# Altium PCB BIOWOLF_FLEX.PcbDoc
Units mm, origin at the board's own origin, x right, y up, seen from the top; angles counter-clockwise.
Board outline 152.4 x 101.6 mm, 4 copper layers (Top Layer, Mid-Layer 1, Mid-Layer 2, Bottom Layer); 78 components, 173 nets, 454 pads, 64 vias.
Unrouted connection lines stored in the file: 142.
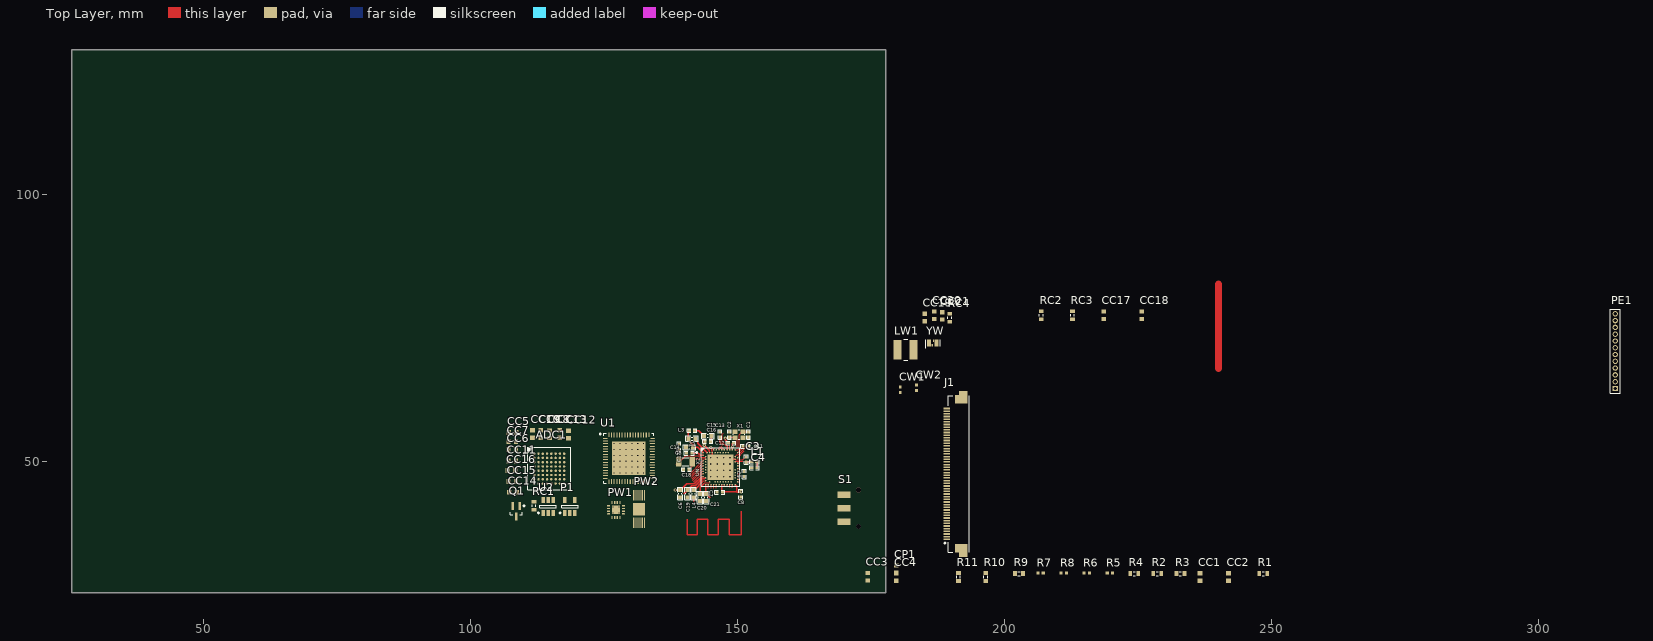
[diagram p0: Top Layer view]
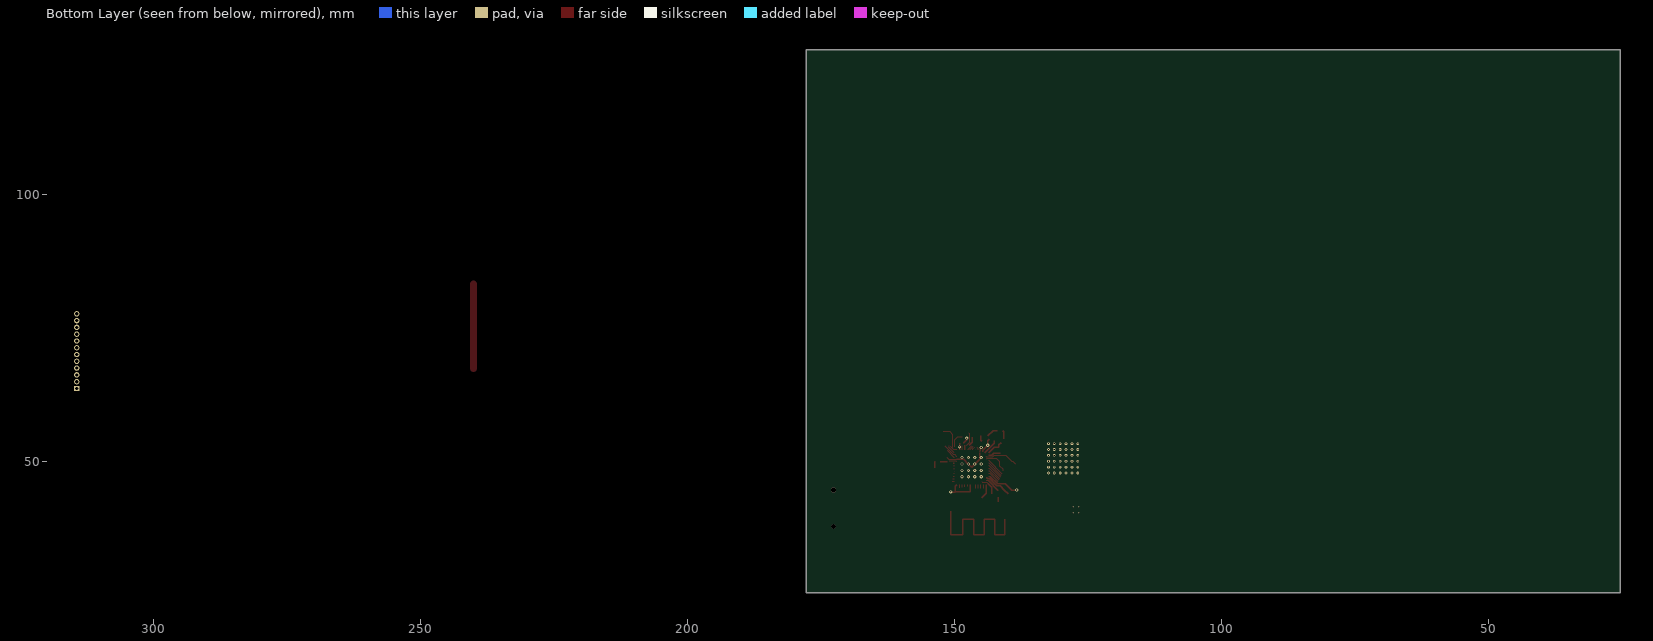
[diagram p1: Bottom Layer view, seen from below]
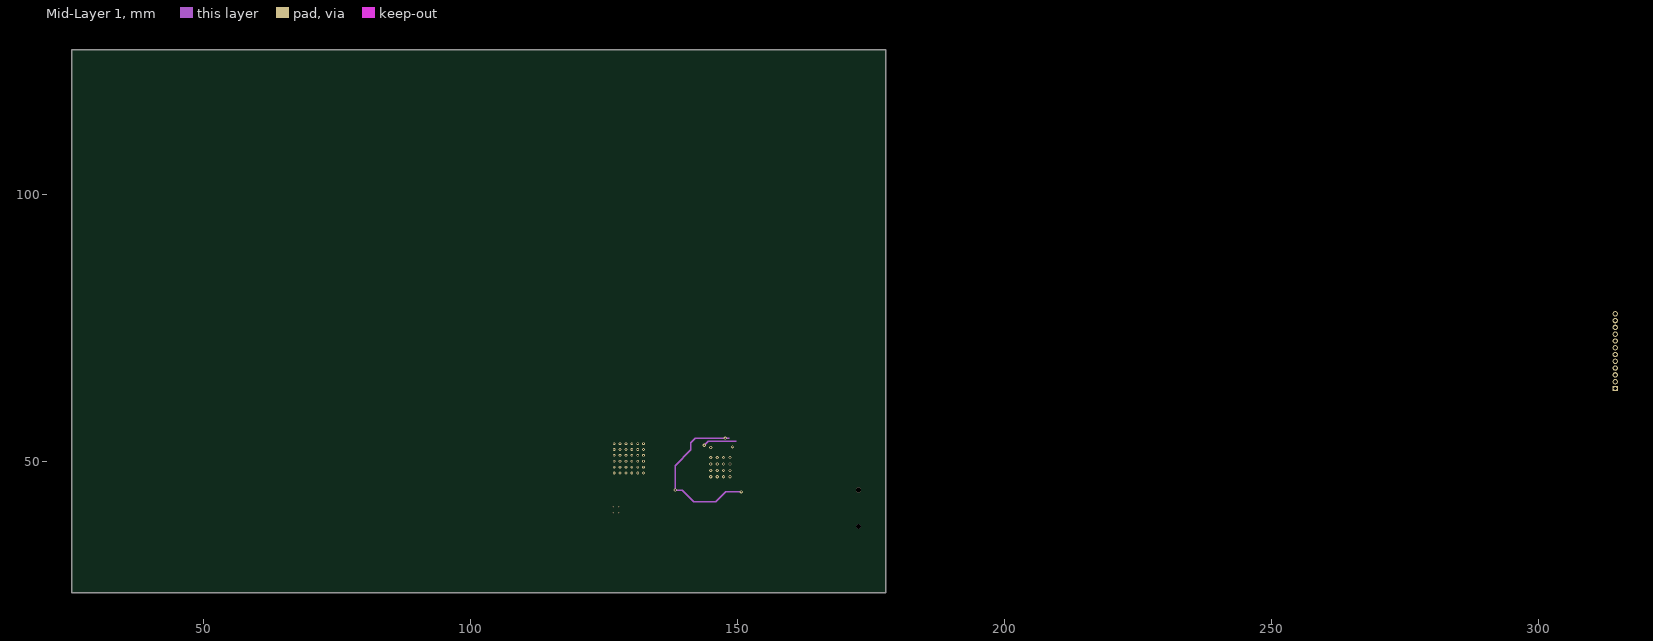
[diagram p2: Mid-Layer 1]

## Layer stack, top to bottom
Top Solder: solder mask 0.0102, Solder Resist, Dk 3.5
Top Layer: signal copper 0.0356
Dielectric 1: dielectric 0.32, FR-4, Dk 4.8
Mid-Layer 1: signal copper 0.0356
Dielectric2: dielectric 0.32, FR-4, Dk 4.8
Mid-Layer 2: signal copper 0.0356
Dielectric3: dielectric 0.32, FR-4, Dk 4.8
Bottom Layer: signal copper 0.0356
Bottom Solder: solder mask 0.0102, Solder Resist, Dk 3.5

## Board outline
25.4,25.4 177.8,25.4 177.8,127 25.4,127

## Design rules (kind name [scope] priority, off if disabled: settings)
Clearance [All] p1: gap=0.254
PolygonConnect [All] p1: connectstyle=Relief reliefconductorwidth=0.254 reliefentries=4 polygonreliefangle="90 Angle" airgapwidth=0.254
RoomDefinition ADC [InComponentClass('ADC')] p1: confinementstyle=ConfineIn formatcopy=TRUE lockcomponents=FALSE outline 178.943,62.484 350.774,62.484 350.774,81.28 178.943,81.28
RoomDefinition BATTERY [InComponentClass('BATTERY')] p2: confinementstyle=ConfineIn formatcopy=TRUE lockcomponents=FALSE outline 178.943,26.924 249.936,26.924 249.936,32.258 178.943,32.258
RoomDefinition NRF [InComponentClass('NRF')] p3: confinementstyle=ConfineIn formatcopy=TRUE lockcomponents=FALSE outline 178.943,76.962 187.706,76.962 187.706,87.376 178.943,87.376
RoomDefinition MRWOLF [InComponentClass('MRWOLF')] p4: confinementstyle=ConfineIn formatcopy=TRUE lockcomponents=FALSE outline 178.943,62.484 200.406,62.484 200.406,75.692 178.943,75.692
RoomDefinition CNCTS [InComponentClass('CNCTS')] p5: confinementstyle=ConfineIn formatcopy=TRUE lockcomponents=FALSE outline 226.194,52.071 234.068,52.071 234.068,86.361 226.194,86.361
RoutingVias [All] p1: holewidth=0.711 width=1.27 viastyle="Through Hole" minholewidth=0.711 minwidth=1.27 maxholewidth=0.711 maxwidth=1.27
SolderMaskExpansion [All] p1: expansion=0.102
Width [All] p1: maxlimit=0.254 minlimit=0.254 preferedwidth=0.254
30 further rules are at their usual default settings.

## Classes and differential pairs
component class NRF: C1 C2 C3 C4 C5 C6 C7 C8 C9 C11 C12 C13 C14 C15 C16 C17 C18 C19 C20 C21 CN1 CN2 CN3 CN4 CN5 CN6 CN7 CN8 CN9 CN10 CN11 CN12 CN13 CN14 CN15 CN16 CN17 CN18 CN19 CN20 CN21 CN22 L1 L2 L3 L4 LN1 LN2 LN3 LN4 UN X1 X2 XN1 XN2
component class MRWOLF: CW1 CW2 LW1 U1 YW
component class CNCTS: J1
component class BATTERY: CC1 CC2 CC3 CC4 CP1 P1 PW1 PW2 R1 R2 R3 R4 R5 R6 R7 R8 R9 R10 R11 S1
component class ADC: ADC1 CC5 CC6 CC7 CC8 CC9 CC10 CC11 CC12 CC13 CC14 CC15 CC16 CC17 CC18 CC19 CC20 CC21 PE1 Q1 RC1 RC2 RC3 RC4 U2

## Components (designator, comment, footprint, x,y, rotation, side; value= is the part's Value field where it differs from the comment)
ADC1 "ADS1298BGA" LFBGA64 114.751,48.622 r0 top
C1 "12pF" CAPC1005X04L 152.072,54.977 r270 top
C2 "12pF" CAPC1005X04L 148.516,54.977 r90 top
C3 "1.0pF" CAPC1005X04L 151.638,50.292 r270 top
C4 "1.0pF" CAPC1005X04L 153.162,48.768 r0 top
C5 "100nF" CAPC1005X04L 140.97,51.507 r180 top
C6 "4.7µF" CAPC1608X06L 139.295,43.932 r270 top
C7 "100nF" CAPC1005X04L 146.685,44.196 r180 top
C8 "100nF" CAPC1005X04L 150.622,43.815 r270 top
C9 "820pF" CAPC1005X04L 151.257,47.625 r270 top
C11 "100pF" CAPC1005X04L 151.533,52.807 r0 top
C12 "100nF" CAPC1005X04L 148.758,53.432 r0 top
C13 "N.C." CAPC1005X04L 146.708,54.982 r90 top
C14 "1.0µF" CAPC1608X06L 140.995,52.607 r180 top
C15 "1.0µF" CAPC1608X06L 144.445,54.746 r180 top
C16 "47nF" CAPC1005X04L 144.433,53.708 r0 top
C17 "12pF" CAPC1005X04L 139.065,52.705 r90 top
C18 "12pF" CAPC1005X04L 140.418,48.457 r180 top
C19 "4.7µF" CAPC1608X06L 140.645,43.932 r270 top
C20 "4.7µF" CAPC1608X06L 142.995,43.207 r270 top
C21 "4.7µF" CAPC1608X06L 144.17,43.207 r270 top
CC1 "Cap Semi" 1608[0603] 236.601,28.321 r90 top
CC2 "Cap Semi" 1608[0603] 241.935,28.321 r90 top
CC3 "Cap Semi" 1608[0603] 174.371,28.383 r90 top
CC4 "Cap Semi" 1608[0603] 179.705,28.321 r90 top
CC5 "Cap Semi" 1608[0603] 107.885,55.372 r180 top
CC6 "Cap Semi" 1608[0603] 107.823,52.197 r180 top
CC7 "Cap Semi" 1608[0603] 107.823,53.721 r180 top
CC8 "Cap Semi" 1608[0603] 114.808,55.053 r270 top
CC9 "Cap Semi" 1608[0603] 113.157,55.118 r270 top
CC10 "Cap Semi" 1608[0603] 111.633,55.118 r270 top
CC11 "Cap Semi" 1608[0603] 107.823,50.038 r180 top
CC12 "Cap Semi" 1608[0603] 118.364,54.991 r270 top
CC13 "Cap Semi" 1608[0603] 116.713,55.118 r270 top
CC14 "Cap Semi" 1608[0603] 107.95,44.196 r180 top
CC15 "Cap Semi" 1608[0603] 107.823,46.228 r180 top
CC16 "Cap Semi" 1608[0603] 107.696,48.26 r180 top
CC17 "Cap Semi" 1608[0603] 218.567,77.343 r90 top
CC18 "Cap Semi" 1608[0603] 225.679,77.343 r90 top
CC19 "Cap Semi" 1608[0603] 185.039,76.897 r90 top
CC20 "Cap Semi" 1608[0603] 186.817,77.343 r90 top
CC21 "Cap Semi" 1608[0603] 188.341,77.216 r90 top
CP1 "Cap Semi" 1608[0603] 179.705,29.845 r90 top
CW1 "4.7uF" 0402 180.467,63.381 r90 top
CW2 "100nF" 0402 183.515,63.762 r90 top
J1 "541045096" 541045096 193.428,47.624 r90 top
L1 "3.9nH" INDC1005X04L 153.162,49.911 r0 top
L2 "10µH" INDC1608X06L 141.478,54.229 r0 top
L3 "15nH" INDC1005X04L 141.478,55.753 r180 top
L4 "10µH" INDC1608X06L 141.82,43.932 r90 top
LW1 "SRN4026-220M" BOUR-IND-SRN4026 181.483,70.866 r0 top
P1 "ADP122_3" UJ-5_N 118.618,41.529 r90 top
PE1 "MHDR1X12" MHDR1X12 314.325,63.627 r90 top
PW1 "BQ24075" RGT0016C_SMALL 125.854,41.644 r0 top
PW2 "BQ27441-G1" DRZ12 132.572,43.621 r270 top
Q1 "PMSS3906" SOT323_M 108.585,40.64 r270 top
R1 "Res3" J1-0603 248.412,28.956 r0 top
R2 "Res3" J1-0603 228.6,28.956 r0 top
R3 "Res3" J1-0603 232.918,28.956 r0 top
R4 "Res3" J1-0603 224.282,28.956 r0 top
R5 "Res3" 0402 219.71,29.083 r0 top
R6 "Res3" 0402 215.392,29.083 r0 top
R7 "Res3" 0402 206.756,29.083 r0 top
R8 "Res3" 0402 211.074,29.083 r0 top
R9 "Res3" J1-0603 202.692,28.956 r0 top
R10 "Res3" J1-0603 196.469,28.321 r90 top
R11 "Res3" J1-0603 191.389,28.321 r90 top
RC1 "Res3" J1-0603 111.887,41.656 r270 top
RC2 "Res3" J1-0603 206.883,77.343 r90 top
RC3 "Res3" J1-0603 212.725,77.343 r90 top
RC4 "Res3" J1-0603 189.738,76.847 r90 top
S1 "SW-SPDT" JS102011SAQN 169.926,38.688 r90 top
U1 "Mr. Wolf PULP" QFN50P900X900X100_HS-65N 129.667,50.546 r0 top
U2 "LT1790" SOT-23_A_N 114.554,41.529 r90 top
UN "nRF52840-QIAA" AQFN50P700X700X85_HS-74N 146.795,48.882 r0 top locked
X1 "32MHz" BT-XTAL_2016 150.294,54.977 r180 top
X2 "32.768kHz" XTAL_3215 140.268,49.907 r0 top
YW "32.768kHz" SiT1533-C 186.563,72.136 r0 top

## Footprints (in the part's own frame and the unit in brackets; to place one, negate y for a bottom-side part, rotate by r counter-clockwise, add the part's x,y. Pads: shape width x height; smd on the part's side, far side on the other; paste and mask are expansions set on the pad)
0402 [mm] "Chip Capacitor, Body 1.0x0.5mm, IPC High Density"
  rect 0.6x0.5 smd: 1(-0.5,0) 2(0.5,0)
  body extent -0.55,-0.3 0.55,0.3, height 1.3
1608[0603] [mm] "Chip Capacitor, Body 1.6x0.8mm, IPC High Density"
  rect 0.8x0.9 smd: 1(-0.7,0) 2(0.7,0)
  body extent -0.87,-0.48 0.87,0.48, height 1.3
541045096 [mm] "Connector; FPC/FFC, SM, 50 Position, Right Angle, Pitch 0.50mm, Body 30.5x5.0mm (LxW), Top Contacts"
  rect 0.3x1.2 smd: 1(-12.25,4.25) 2(-11.75,4.25) 3(-11.25,4.25) 4(-10.75,4.25) 5(-10.25,4.25) 6(-9.75,4.25) 7(-9.25,4.25) 8(-8.75,4.25) 9(-8.25,4.25) 10(-7.75,4.25) 11(-7.25,4.25) 12(-6.75,4.25) 13(-6.25,4.25) 14(-5.75,4.25) 15(-5.25,4.25) 16(-4.75,4.25) 17(-4.25,4.25) 18(-3.75,4.25) 19(-3.25,4.25) 20(-2.75,4.25) 21(-2.25,4.25) 22(-1.75,4.25) 23(-1.25,4.25) 24(-0.75,4.25) 25(-0.25,4.25) 26(0.25,4.25) 27(0.75,4.25) 28(1.25,4.25) 29(1.75,4.25) 30(2.25,4.25) 31(2.75,4.25) 32(3.25,4.25) 33(3.75,4.25) 34(4.25,4.25) 35(4.75,4.25) 36(5.25,4.25) 37(5.75,4.25) 38(6.25,4.25) 39(6.75,4.25) 40(7.25,4.25) 41(7.75,4.25) 42(8.25,4.25) 43(8.75,4.25) 44(9.25,4.25) 45(9.75,4.25) 46(10.25,4.25) 47(10.75,4.25) 48(11.25,4.25) 49(11.75,4.25) 50(12.25,4.25)
  rect 2.4x1.6 smd: 51(-14.35,1.15) 52(14.35,1.15)
  rect 1.6x0.8 smd: 51(-13.95,2.35) 52(13.95,2.35)
  silkscreen extent -14.65,0 14.65,4.72, body extent -15.25,-1.05 15.25,3.95, height 2
AQFN50P700X700X85_HS-74N [mm] "AQFN, 73-Leads, Body 7.00x7.00mm, Pitch 0.50mm, Thermal Pad 4.95x4.95mm, IPC Medium Density"
  rect 4.85x4.85 smd mask+0.05: 74(0,0)
  round 0.275 smd paste+0.012 mask+0.05: A8(-1.25,3.25) A10(-0.75,3.25) A12(-0.25,3.25) A14(0.25,3.25) A16(0.75,3.25) A18(1.25,3.25) A20(1.75,3.25) A22(2.25,3.25) A23(2.75,3.25) AA24(3.25,-2.25) AB2(-2.75,-2.5) AC5(-2,-2.75) AC9(-1,-2.75) AC11(-0.5,-2.75) AC13(0,-2.75) AC15(0.5,-2.75) AC17(1,-2.75) AC19(1.5,-2.75) AC21(2,-2.75) AC24(3.25,-2.75) AD2(-2.75,-3.25) AD4(-2.25,-3.25) AD6(-1.75,-3.25) AD8(-1.25,-3.25) AD10(-0.75,-3.25) AD12(-0.25,-3.25) AD14(0.25,-3.25) AD16(0.75,-3.25) AD18(1.25,-3.25) AD20(1.75,-3.25) AD22(2.25,-3.25) AD23(2.75,-3.25) B1(-3.25,2.75) B3(-2.5,2.75) B5(-2,2.75) B7(-1.5,2.75) B9(-1,2.75) B11(-0.5,2.75) B13(0,2.75) B15(0.5,2.75) B17(1,2.75) B19(1.5,2.75) B24(3.25,2.75) C1(-3.25,2.25) D2(-2.75,2) D23(2.75,2) E24(3.25,1.75) F2(-2.75,1.5) F23(2.75,1.5) G1(-3.25,1.25) H2(-2.75,1) H23(2.75,1) J1(-3.25,0.75) J24(3.25,0.75) K2(-2.75,0.5) L1(-3.25,0.25) L24(3.25,0.25) M2(-2.75,0) N1(-3.25,-0.25) N24(3.25,-0.25) P2(-2.75,-0.5) P23(2.75,-0.5) R1(-3.25,-0.75) R24(3.25,-0.75) T2(-2.75,-1) T23(2.75,-1) U1(-3.25,-1.25) U24(3.25,-1.25) V23(2.75,-1.5) W1(-3.25,-1.75) W24(3.25,-1.75) Y2(-2.75,-2) Y23(2.75,-2)
  silkscreen extent -4.56,-3.6 3.6,3.6, body extent -3.55,-3.55 3.55,3.55, height 0.85
BOUR-IND-SRN4026 [mm] "Semi-shielded Power Inductors"
  rect 1.5x3.6 smd: 1(-1.5,0) 2(1.5,0)
  silkscreen extent -0.4,-2 0.4,2, body extent -1.95,-1.95 1.95,1.96, height 2.15
BT-XTAL_2016 [mm] "Crystal 2.0 x 1.6 mm"
  rect 0.95x0.85 smd: 1(-0.725,-0.575) 2(0.725,-0.575) 3(0.725,0.575) 4(-0.725,0.575)
  silkscreen extent -1.08,-0.88 1.08,0.88, body extent -1.05,-0.85 1.05,0.85, height 0.56
CAPC1005X04L [mm] "Chip Capacitor, 2-Leads, Body 1.0x0.5mm, IPC High Density"
  rect 0.6x0.5 smd: 1(-0.5,0) 2(0.5,0)
  silkscreen extent -0.9,-0.35 0.9,0.35, body extent -0.51,-0.25 0.51,0.25, height 0.5
CAPC1608X06L [mm] "Chip Capacitor, 2-Leads, Body 1.6x0.8mm, IPC High Density"
  rect 0.75x0.8 smd: 1(-0.675,0) 2(0.675,0)
  silkscreen extent -1.17,-0.5 1.17,0.5, body extent -0.8,-0.43 0.8,0.43, height 0.8
DRZ12 [mm]
  rect 2.3x2.3 smd: 0(2.6,-1)
  rect 2x0.2 smd: 1(0,0)
  oval 2x0.2 smd: 2(0,-0.4) 3(0,-0.8) 4(0,-1.2) 5(0,-1.6) 6(0,-2) 7(5.15,-2) 8(5.15,-1.6) 9(5.15,-1.2) 10(5.15,-0.8) 11(5.15,-0.4) 12(5.15,0)
INDC1005X04L [mm]
  rect 0.65x0.5 smd: 1(-0.475,0) 2(0.475,0)
  silkscreen extent -0.9,-0.35 0.9,0.35, body extent -0.5,-0.3 0.5,0.3, height 0.5
INDC1608X06L [mm] "Chip Inductor, 2-Leads, Body 1.6x0.8mm, IPC High Density"
  rect 0.75x0.8 smd: 1(-0.675,0) 2(0.675,0)
  silkscreen extent -1.17,-0.5 1.17,0.5, body extent -0.8,-0.48 0.8,0.48, height 0.8
J1-0603 [mm] "Chip Resistor, Body 1.6x0.8mm, IPC High Density"
  rect 0.7x0.9 smd: 1(-0.75,0) 2(0.75,0)
  silkscreen extent -0.2,-0.35 0.2,0.35, body extent -0.85,-0.48 0.85,0.48, height 0.9
JS102011SAQN [mm]
  rect 1.2x2.5 smd: 1(0,0) 2(2.5,0) 3(5,0)
LFBGA64 [mm] "BGA, 64-Leads, Body 8x8mm, Pitch 0.8mm"
  round 0.45 smd: A1(-2.8,2.8) A2(-2,2.8) A3(-1.2,2.8) A4(-0.4,2.8) A5(0.4,2.8) A6(1.2,2.8) A7(2,2.8) A8(2.8,2.8) B1(-2.8,2) B2(-2,2) B3(-1.2,2) B4(-0.4,2) B5(0.4,2) B6(1.2,2) B7(2,2) B8(2.8,2) C1(-2.8,1.2) C2(-2,1.2) C3(-1.2,1.2) C4(-0.4,1.2) C5(0.4,1.2) C6(1.2,1.2) C7(2,1.2) C8(2.8,1.2) D1(-2.8,0.4) D2(-2,0.4) D3(-1.2,0.4) D4(-0.4,0.4) D5(0.4,0.4) D6(1.2,0.4) D7(2,0.4) D8(2.8,0.4) E1(-2.8,-0.4) E2(-2,-0.4) E3(-1.2,-0.4) E4(-0.4,-0.4) E5(0.4,-0.4) E6(1.2,-0.4) E7(2,-0.4) E8(2.8,-0.4) F1(-2.8,-1.2) F2(-2,-1.2) F3(-1.2,-1.2) F4(-0.4,-1.2) F5(0.4,-1.2) F6(1.2,-1.2) F7(2,-1.2) F8(2.8,-1.2) G1(-2.8,-2) G2(-2,-2) G3(-1.2,-2) G4(-0.4,-2) G5(0.4,-2) G6(1.2,-2) G7(2,-2) G8(2.8,-2) H1(-2.8,-2.8) H2(-2,-2.8) H3(-1.2,-2.8) H4(-0.4,-2.8) H5(0.4,-2.8) H6(1.2,-2.8) H7(2,-2.8) H8(2.8,-2.8)
  silkscreen extent -4.77,-4 4,4, body extent -4,-4 4,4, height 1.7
MHDR1X12 [mm] "Connector; Header; 12 Position"
  rect 1x1 hole 0.6: 1(0,0)
  round 1 hole 0.6: 2(1.27,0) 3(2.54,0) 4(3.81,0) 5(5.08,0) 6(6.35,0) 7(7.62,0) 8(8.89,0) 9(10.16,0) 10(11.43,0) 11(12.7,0) 12(13.97,0)
  silkscreen extent -0.9,-0.9 14.87,0.9
QFN50P900X900X100_HS-65N [mm] "QFN, 64-Leads, Body 9.00x9.00mm, Pitch 0.50mm, Thermal Pad 6.30x6.30mm, IPC Medium Density"
  oval 0.85x0.2 smd: 1(-4.425,3.75) 16(-4.425,-3.75) 33(4.425,-3.75) 48(4.425,3.75)
  oval 0.95x0.2 smd: 2(-4.375,3.25) 3(-4.375,2.75) 4(-4.375,2.25) 5(-4.375,1.75) 6(-4.375,1.25) 7(-4.375,0.75) 8(-4.375,0.25) 9(-4.375,-0.25) 10(-4.375,-0.75) 11(-4.375,-1.25) 12(-4.375,-1.75) 13(-4.375,-2.25) 14(-4.375,-2.75) 15(-4.375,-3.25) 34(4.375,-3.25) 35(4.375,-2.75) 36(4.375,-2.25) 37(4.375,-1.75) 38(4.375,-1.25) 39(4.375,-0.75) 40(4.375,-0.25) 41(4.375,0.25) 42(4.375,0.75) 43(4.375,1.25) 44(4.375,1.75) 45(4.375,2.25) 46(4.375,2.75) 47(4.375,3.25)
  oval 0.2x0.85 smd: 17(-3.75,-4.425) 32(3.75,-4.425) 49(3.75,4.425) 64(-3.75,4.425)
  oval 0.2x0.95 smd: 18(-3.25,-4.375) 19(-2.75,-4.375) 20(-2.25,-4.375) 21(-1.75,-4.375) 22(-1.25,-4.375) 23(-0.75,-4.375) 24(-0.25,-4.375) 25(0.25,-4.375) 26(0.75,-4.375) 27(1.25,-4.375) 28(1.75,-4.375) 29(2.25,-4.375) 30(2.75,-4.375) 31(3.25,-4.375) 50(3.25,4.375) 51(2.75,4.375) 52(2.25,4.375) 53(1.75,4.375) 54(1.25,4.375) 55(0.75,4.375) 56(0.25,4.375) 57(-0.25,4.375) 58(-0.75,4.375) 59(-1.25,4.375) 60(-1.75,4.375) 61(-2.25,4.375) 62(-2.75,4.375) 63(-3.25,4.375)
  rect 6.3x6.3 smd: 65(0,0)
  silkscreen extent -5.47,-4.7 4.7,4.7, body extent -4.6,-4.6 4.6,4.6, height 1
RGT0016C_SMALL [mm]
  rect 1.55x1.55 smd: 0(1.4,-0.75)
  oval 0.6x0.24 smd: 1(0,0) 2(0,-0.5) 3(0,-1) 4(0,-1.5) 9(2.8,-1.5) 10(2.8,-1) 11(2.8,-0.5) 12(2.8,0)
  oval 0.24x0.6 smd: 5(0.65,-2.15) 6(1.15,-2.15) 7(1.65,-2.15) 8(2.15,-2.15) 13(2.15,0.65) 14(1.65,0.65) 15(1.15,0.65) 16(0.65,0.65)
SiT1533-C [mm] "Ultra-Low Power Quartz XTAL Replacement - XTAL Compatible Footprint"
  rect 0.75x1.4 smd: 1(-0.725,0) 3(0.725,0)
  rect 0.2x0.5 smd: 2(-0.1,-0.45) 4(0.1,0.45)
  silkscreen extent -1.4,-0.85 1.35,0.6, body extent -1,-0.6 1,0.6, height 0.55
SOT323_M [mm] "SOT323, 3-Leads, Body 2.0x1.3mm, Pitch 0.65mm, Lead Span 2.1mm, IPC Low Density"
  rect 1.5x0.5 smd: 1(-1,0.65) 2(-1,-0.65) 3(1,0)
  silkscreen extent -1.12,-1.1 0.7,1.58, body extent -0.7,-1.1 0.7,1.1, height 1.1
SOT-23_A_N [mm] "SOT23, 6-Leads, Body 2.9x1.7mm, Pitch 0.95mm, Lead Span 2.8mm, IPC Medium Density"
  rect 1.1x0.65 smd: 1(-1.2,0.95) 2(-1.2,0) 3(-1.2,-0.95) 4(1.2,-0.95) 5(1.2,0) 6(1.2,0.95)
  silkscreen extent -1.32,-1.55 0.25,1.95, body extent -0.9,-1.55 0.9,1.55, height 1.45
UJ-5_N [mm] "SOT23, 5-Leads, Body 2.9x1.7mm, Pitch 0.95mm, Lead Span 2.8mm, IPC Medium Density"
  rect 1.1x0.65 smd: 1(-1.2,0.95) 2(-1.2,0) 3(-1.2,-0.95) 4(1.2,-0.95) 5(1.2,0.95)
  silkscreen extent -1.32,-1.55 0.25,1.95, body extent -0.9,-1.55 0.9,1.55, height 1
XTAL_3215 [mm] "XTAL SMD 3.2 x 1.5 mm"
  rect 1x1.8 smd: 1(-1.25,0) 2(1.25,0)
  silkscreen extent -0.6,-0.75 0.6,0.75, body extent -1.6,-0.75 1.6,0.75, height 0.81

## Part data
ADC1: library part ADS1298_BGA
C1 C2 C17 C18: library part C0402-12p, "Capacitor, NP0, ±2%"
C3 C4: library part C0402-1.0p, "Capacitor, NP0, ±5%"
C5 C7 C8 C12: library part C0402-100n, "Capacitor, X7R, ±10%"
C6 C20: library part C0603-4µ7-6.3V-X7R, "Capacitor, X7R, ±10%"
C9: library part C0402-820p, "Capacitor, NP0, ±5%"
C11: library part C0402-100p, "Capacitor, NP0, ±5%"
C13: library part C0402-N.C., "Not mounted"
C14 C15: library part C0603-1µ0, "Capacitor, X7R, ±10%"
C16: library part C0402-47n, "Capacitor, X7R, ±10%"
C19 C21: library part C0603-4µ7-10V-X7S, "Capacitor, X7S, ±10%"
CC1 CC2 CC3 CC4 CC5 CC6 CC7 CC8 CC9 CC10 CC11 CC12 CC13 CC14 CC15 CC16 CC17 CC18 CC19 CC20 CC21 CP1: "Capacitor (Semiconductor SIM Model)"
CW1 CW2: library part "Cap Semi", "Capacitor (Semiconductor SIM Model)"
J1: "FPC/FFC Connector, Right Angle, SMT, ZIF, Top Contact Style, 50 Position, Pitch 0.50mm (.020\"), Lead-free"
L1: library part L0402-3n9, "High frequency chip inductor ±5%"
L2: library part L0603-10µ, "Chip inductor, IDC,min = 50 mA, ±20%"
L3: library part L0402-15n, "High frequency chip inductor ±10%"
L4: library part L0603-10µ, "Chip inductor, IDC,min = 80 mA, ±20%"
LW1: library part BOUR-IND-SRN4026-220M, "Semi-shielded Power Inductor, 22uH, 3A"
P1: library part ADP122, "Regulator"
PE1: "Header, 12-Pin"
Q1: "PNP Switching Transistor"
R1 R2 R3 R4 R5 R6 R7 R8 R9 R10 R11 RC1 RC2 RC3 RC4: "Resistor"
S1: "SPDT Subminiature Toggle Switch, Right Angle Mounting, Vertical Actuation"
U1: library part PULP_MR_WOLF, "Mr. Wolf PULP Heterogeneous Multi-Core System-On-Chip"
UN: library part nRF52840-QIAAC0, "Multi-protocol Bluetooth Low Energy, IEEE 802.15.4, ANT and 2.4GHz proprietary system-on-chip"
X1: library part XTAL_SMD2016_32MHz_8pF_General, "XTAL SMD 2016, 32MHz, Cl=8pF, Total Tol: ±40ppm"
X2: library part XTAL_SMD3215_32.768kHz_9pF_General, "XTAL SMD 3215, 32.768kHz, Cl=9pF, Total Tol: ±50ppm"
YW: library part SIT-OSC32KHZ-SIT1533AC-H5-DCC-32.768, "20 ppm, Ultra-Low Power 32.768 kHz Quartz XTAL Replacement"

## Via types
v1: diameter 0.5, hole 0.2, Top Layer to Bottom Layer, 36 vias
v2: diameter 0.61, hole 0.305, Top Layer to Bottom Layer, tented both sides, 22 vias
v3: diameter 0.3, hole 0.2, Top Layer to Bottom Layer, 4 vias
v4: diameter 0.9, hole 0.9, Top Layer to Bottom Layer, 2 vias

## Nets (pads, with @x,y where several pads share a name; then routed paths per layer and width w, separated by ;. In a path a pad name is that pad's centre, name@x,y a point inside that pad or via, vN(x,y) a via of type N, cw(c..) or ccw(c..) an arc to the next point about the centre after c; other vN are vias at no path point)
AGND: CC5.1 CC8.1 CC9.1 CC10.1 CC11.1 CC12.1 CC13.1 CC14.1 CC15.1 CC16.1 CC17.1 CC18.1 CC19.1 CC20.1 CC21.1 CP1.1 P1.2 PE1.12 RC4.1 U2.1 U2.2
AVDD: CC8.2 CC9.2 CC17.2 CC18.2 CP1.2 P1.5 PE1.11 U2.4
BAT_IN: CC4.2 PW2.6 PW2.8 R11.2
BOOTSEL: U1.1
CAM.DATA0: U1.19
CAM.DATA1: U1.20
CAM.DATA2: U1.21
CAM.DATA3: U1.22
CAM.DATA4: U1.23
CAM.DATA5: U1.24
CAM.DATA6: U1.25
CAM.DATA7: U1.27
CAM.HSYNC: U1.18
CAM.PCLK: U1.17
CAM.VSYNC: U1.28
D+: UN.AD6 | length 0.6
  Top Layer w0.2: 145.045,44.982 UN.AD6
D-: UN.AD4 | length 0.6
  Top Layer w0.2: 144.545,44.982 UN.AD4
DEC1: C5.1 UN.C1 | length 2.2
  Top Layer w0.25: C5.1 142.695,51.507 143.07,51.132 UN.C1
DEC3: C11.1 UN.D23 | length 3
  Top Layer w0.15: UN.D23 149.551,50.882 149.876,51.207 150.145,51.207 151.745,52.807 ; C11.1@150.983,52.807 C11.1
DEC4_6: C15.2 C16.1 L3.1 UN.B5 UN.E24 | length 13.2
  Top Layer w0.15: UN.E24 150.045,50.69 151.287,51.932
  Top Layer w0.25: 143.495,54.132 143.77,53.857 v2(143.77,52.994) 144.695,52.069 144.695,51.808
  Top Layer w0.254: L3.1 142.763,55.753 C15.2
  Mid-Layer 1 w0.25: v2(143.77,52.994) 144.484,53.708 149.792,53.708
DGND: CC6.1 CC7.1
DVDD: CC6.2 CC7.2 R9.2 R10.2
EL1: PE1.1
EL2: PE1.2
EL3: PE1.3
EL4: PE1.4
EL5: ADC1.A8 PE1.5
EL6: ADC1.A6 PE1.6
EL7: ADC1.A4 PE1.7
EL8: ADC1.A2 PE1.8
GND: C1.2 C2.2 C3.1 C4.1 C5.2 C6.2 C7.2 C8.2 C9.2 C11.2 C12.2 C13.2 C14.2 C15.1 C16.2 C17.2 C18.2 C19.2 C20.2 C21.2 CC1.1 CC2.1 CC3.1 CC4.1 CW1.1 CW2.1 PW1.0 PW1.4 PW1.8 PW1.14 PW2.0 PW2.3 R1.2 R2.2 R3.2 R5.1 R7.1 S1.1 U1.49 U1.65 UN.74 UN.B7 UN.F23 X1.2 X1.4 YW.2 | length 10.6
  Top Layer w0.145: UN.F23 149.65,50.277 150.966,50.277 151.347,50.657
  Top Layer w0.25: C16.2 145.12,53.895 C15.1 ; v2@145.137,52.524 145.137,51.963 145.295,51.806 ; UN.B7 145.295,50.382 UN.74 v2(147.395,49.482) 148.295,50.382 UN.F23
  other v1: 126.917,47.796 128.017,47.796 129.117,47.796 130.217,47.796 131.317,47.796 132.417,47.796 126.917,48.896 128.017,48.896 129.117,48.896 130.217,48.896 131.317,48.896 132.417,48.896 126.917,49.996 128.017,49.996 129.117,49.996 130.217,49.996 131.317,49.996 132.417,49.996 126.917,51.096 128.017,51.096 129.117,51.096 130.217,51.096 131.317,51.096 132.417,51.096 126.917,52.196 128.017,52.196 129.117,52.196 130.217,52.196 131.317,52.196 132.417,52.196 126.917,53.296 128.017,53.296 129.117,53.296 130.217,53.296 131.317,53.296 132.417,53.296
  other v2: 144.995,47.082 146.195,47.082 147.395,47.082 148.595,47.082 144.995,48.282 146.195,48.282 147.395,48.282 148.595,48.282 144.995,49.482 146.195,49.482 148.595,49.482 144.995,50.682 146.195,50.682 147.395,50.682 148.595,50.682 144.995,52.582
  other v3: 126.704,40.344 127.804,40.344 126.704,41.444 127.804,41.444
HYPER_0.C\K\: U1.14
HYPER_0.C\S\: U1.15
HYPER_0.CK: U1.13
HYPER_0.DQ0: U1.10
HYPER_0.DQ1: U1.9
HYPER_0.DQ2: U1.8
HYPER_0.DQ3: U1.7
HYPER_0.DQ4: U1.5
HYPER_0.DQ5: U1.4
HYPER_0.DQ6: U1.3
HYPER_0.DQ7: U1.2
HYPER_0.RWDS: U1.11
HYPER_1.C\S\: U1.16
I2C.SCL: U1.63
I2C.SDA: U1.64
I2S0_SCK: U1.43
I2S0_SDI: U1.41
I2S0_WS: U1.42
I2S1_SDI: U1.39
JTAG.T\R\S\T\: U1.48
JTAG.TCK: U1.44
JTAG.TDI: U1.47
JTAG.TDO: U1.46
JTAG.TMS: U1.45
NetADC1_A34: 
NetADC1_A35: 
NetADC1_A36: 
NetADC1_A39: 
NetADC1_A40: 
NetADC1_A43: 
NetADC1_A47: 
NetC3_2: C3.2 L1.1 UN.H23 | length 2.8
  Top Layer w0.145: UN.H23 149.65,49.987 151.015,49.987
  Top Layer w0.254: 151.384,49.911 L1.1
NetC9_1: C9.1 UN.N24 | length 0.1
  Top Layer w0.25: UN.N24 UN.N24@150.121,48.632
NetC13_1: C13.1 UN.A18 | length 2.6
  Top Layer w0.25: C13.1 146.708,53.531 147.283,52.956 ; UN.A18 148.045,52.956
NetC20_1: C20.1 UN.AC5 | length 3.5
  Top Layer w0.184: 143.637,45.754 143.89,46.007 144.67,46.007 UN.AC5
  Top Layer w0.25: C20.1 142.995,45.112 143.637,45.754
NetC23_1: 
NetCC3_2: CC3.2 PW2.5
NetL2_1: L2.1 L3.2 | length 1.6
  Top Layer w0.254: L2.1 140.803,55.553 L3.2
NetL2_2: L2.2 UN.B3 | length 2.9
  Top Layer w0.25: 142.545,53.857 142.545,53.382 UN.B3
NetL4_2: L4.2 UN.AB2 | length 2.9
  Top Layer w0.21: 143.609,46.349 144.012,46.349 UN.AB2
  Top Layer w0.25: L4.2 141.867,44.607 143.572,46.312
NetLW1_2: LW1.2 U1.50
NetP1_3: P1.3
NetPW1_1: PW1.1 R2.1
NetPW1_5: PW1.5 R5.2 R6.2
NetPW1_6: PW1.6 R7.2 R8.2
NetPW1_7: PW1.7
NetPW1_9: PW1.9
NetPW1_12: PW1.12 R3.1
NetPW1_16: PW1.16 R1.1
NetPW2_1: PW2.1 R9.1
NetPW2_2: PW2.2 R10.1
NetQ1_1: Q1.1 RC1.2
NetQ1_2: Q1.2 RC2.2 RC3.1
NetR4_1: R4.1 S1.3
NetRC1_1: RC1.1
NetU1_62: U1.62 YW.3
P0.00/XL1: C17.1 UN.D2 X2.1 | length 6.3
  Top Layer w0.145: X2.1@138.543,49.432 X2.1 139.17,49.907 140.303,51.039 142.678,51.039 142.928,50.789 142.938,50.789 142.95,50.777 143.94,50.777 UN.D2
P0.01/XL2: C18.1 UN.F2 X2.2 | length 4.7
  Top Layer w0.145: C18.1 141.518,49.057 X2.2 142.098,50.487 143.94,50.487 UN.F2
  Top Layer w0.15: C18.1@140.918,48.232 C18.1
P0.02/AIN0: UN.A12 | length 0.5
  Top Layer w0.15: 146.305,52.547 146.545,52.307 UN.A12
P0.03/AIN1: UN.B13
P0.04/AIN2: UN.J1 | length 3.3
  Top Layer w0.15: 141.219,47.312 143.539,49.632 UN.J1
P0.05/AIN3: UN.K2
P0.06: UN.L1 | length 3.1
  Top Layer w0.15: 141.355,47.017 143.47,49.132 UN.L1
P0.07: UN.M2
P0.08: UN.N1 | length 2.8
  Top Layer w0.15: 141.535,46.722 143.445,48.632 UN.N1
P0.09/NFC1: UN.L24 | length 0.1
  Top Layer w0.25: UN.L24 UN.L24@150.18,49.132
P0.10/NFC2: UN.J24 | length 0.2
  Top Layer w0.25: UN.J24 150.239,49.632
P0.11: UN.T2
P0.12: UN.U1 | length 2.4
  Top Layer w0.15: 141.787,46.132 143.287,47.632 UN.U1
P0.13: UN.AD8 | length 0.6
  Top Layer w0.15: 145.545,44.982 UN.AD8
P0.14: UN.AC9
P0.15: UN.AD10 | length 0.7
  Top Layer w0.15: 146.045,44.899 UN.AD10
P0.16: UN.AC11
P0.17: UN.AD12
P0.18/RESET: UN.AC13
P0.19: UN.AC15
P0.20: UN.AD16 | length 0.4
  Top Layer w0.15: 147.545,45.274 UN.AD16
P0.21: UN.AC17
P0.22: UN.AD18 | length 0.4
  Top Layer w0.15: 148.045,45.191 UN.AD18
P0.23: UN.AC19
P0.24: UN.AD20 | length 0.5
  Top Layer w0.15: 148.545,45.109 UN.AD20
P0.25: UN.AC21
P0.26: UN.G1 | length 3.6
  Top Layer w0.15: 141.014,47.607 143.539,50.132 UN.G1
P0.27: UN.H2
P0.28/AIN4: UN.B11
P0.29/AIN5: UN.A10 | length 0
  Top Layer w0.15: UN.A10@146.01,52.167 UN.A10
P0.30/AIN6: UN.B9
P0.31/AIN7: UN.A8 | length 0.5
  Top Layer w0.15: UN.A8 145.545,52.342 145.715,52.512
P1.00: UN.AD22 | length 0.6
  Top Layer w0.15: 149.045,45.027 UN.AD22
P1.01: UN.Y23
P1.02: UN.W24 | length 0.2
  Top Layer w0.15: UN.W24 150.229,47.132
P1.03: UN.V23
P1.04: UN.U24 | length 0.1
  Top Layer w0.15: UN.U24 UN.U24@150.147,47.632
P1.05: UN.T23
P1.06: UN.R24 | length 0
  Top Layer w0.15: UN.R24 UN.R24@150.064,48.132
P1.07: UN.P23
P1.08: UN.P2
P1.09: UN.R1 | length 2.6
  Top Layer w0.15: 141.665,46.427 143.37,48.132 UN.R1
P1.10: UN.A20 | length 3.4
  Top Layer w0.15: 147.308,55.282 147.183,55.157 147.183,53.544 147.783,52.944 ; UN.A20 148.545,52.944
P1.11: UN.B19
P1.12: UN.B17
P1.13: UN.A16 | length 0.9
  Top Layer w0.15: 146.895,52.791 147.545,52.141 UN.A16
P1.14: UN.B15
P1.15: UN.A14 | length 0.7
  Top Layer w0.15: 146.6,52.669 147.045,52.224 UN.A14
POR_N: U1.57
PULP_RST: U1.60
REF: ADC1.A1 ADC1.A3 ADC1.A5 ADC1.A7 PE1.9
REF1.5V: CC21.2 PE1.10 RC3.2 RC4.2
REF2V: CC19.2 CC20.2 Q1.3 RC2.1 U2.6
RF: C4.2 L1.2 | length 1.2
  Top Layer w0.254: L1.2 153.662,49.886 C4.2
SPIM_0.C\S\: U1.38
SPIM_0.SCK: U1.30
SPIM_0.SIO0: U1.31
SPIM_0.SIO1: U1.33
SPIM_0.SIO2: U1.34
SPIM_0.SIO3: U1.35
SPIM_1.C\S\: U1.36
SWDCLK: UN.AA24 | length 0.3
  Top Layer w0.15: UN.AA24 150.312,46.632
SWDIO: UN.AC24 | length 0.3
  Top Layer w0.15: UN.AC24 150.395,46.132
SYSOFF: PW1.15 S1.2
UART.RX: U1.58
UART.TX: U1.59
V1.8: YW.4
VAVD: U1.52 U1.53
VBAT: CC2.2 PW1.2 PW1.3 PW2.7 R4.2 R11.1
VBUS: C21.1 UN.AD2 | length 2.9
  Top Layer w0.25: UN.AD2 144.045,44.007 C21.1 144.92,43.132
VCAP1: CC13.2
VCAP2: CC5.2
VCAP3: CC14.2 CC15.2
VCAP4: CC10.2
VCLU: U1.29 U1.32 U1.37
VDD_HV: C19.1 UN.Y2 | length 5.3
  Top Layer w0.25: 139.97,43.932 C19.1 141.42,45.382 142.084,45.382 143.425,46.724 143.81,46.724 143.969,46.882 UN.Y2
VDD_NRF: C6.1 C7.1 C8.1 C12.1 C14.1 L4.1 UN.A22 UN.AD14 UN.AD23 UN.B1 UN.W1 | length 51.1
  Top Layer w0.25: v2(138.345,44.607) C6.1 140.47,45.782 141.925,45.782 143.275,47.132 UN.W1 ; 141.27,53.482 141.67,53.082 C14.1 142.57,52.607 UN.B1 ; 141.82,42.382 L4.1 ; UN.AD14 147.045,44.257 147.574,44.257 ; v2(147.708,54.332) 147.708,53.982 C12.1 C12.1@148.283,53.407 ; UN.A22 149.045,53.407 ; UN.AD23 149.82,45.357 149.82,44.257 149.87,44.207 C8.1@150.72,44.207
  Top Layer w0.254: 147.574,44.257 149.82,44.257
  Mid-Layer 1 w0.25: 148.47,54.332 142.12,54.332 141.27,53.482 141.27,52.107 138.345,49.182 v2(138.345,44.607) 139.645,44.607 141.845,42.407 145.97,42.407 147.82,44.257 v2(150.72,44.257)
VIO: U1.6 U1.12 U1.26 U1.40
VREFP: CC11.2 CC12.2
VREG: CW1.2 CW2.2 LW1.1 U1.54 U1.56
VSOC: U1.61
VSYS: P1.1 PW1.10 PW1.11 R6.1 R8.1
VUSB: CC1.2 PW1.13
WCT: CC16.2
XC1: C1.1 UN.B24 X1.1 | length 5.8
  Top Layer w0.15: UN.B24 151.045,52.632 ; 150.283,52.632 150.283,54.982 150.778,55.477 C1.1
XC2: C2.1 UN.A23 X1.3 | length 4.3
  Top Layer w0.15: C2.1 149.494,54.477 X1.3 149.958,54.014 149.958,52.732 ; UN.A23 150.12,52.132 150.72,52.732
pads on no net: ADC1.B1 ADC1.B2 ADC1.B3 ADC1.B4 ADC1.B5 ADC1.B6 ADC1.B7 ADC1.B8 ADC1.C1 ADC1.C2 ADC1.C3 ADC1.C4 ADC1.C5 ADC1.C6 ADC1.C7 ADC1.C8 ADC1.D1 ADC1.D2 ADC1.D3 ADC1.D4 ADC1.D5 ADC1.D6 ADC1.D7 ADC1.D8 ADC1.E1 ADC1.E2 ADC1.E3 ADC1.E4 ADC1.E5 ADC1.E6 ADC1.E7 ADC1.E8 ADC1.F1 ADC1.F2 ADC1.F3 ADC1.F4 ADC1.F5 ADC1.F6 ADC1.F7 ADC1.F8 ADC1.G1 ADC1.G2 ADC1.G3 ADC1.G4 ADC1.G5 ADC1.G6 ADC1.G7 ADC1.G8 ADC1.H1 ADC1.H2 ADC1.H3 ADC1.H4 ADC1.H5 ADC1.H6 ADC1.H7 ADC1.H8 J1.1 J1.2 J1.3 J1.4 J1.5 J1.6 J1.7 J1.8 J1.9 J1.10 J1.11 J1.12 J1.13 J1.14 J1.15 J1.16 J1.17 J1.18 J1.19 J1.20 J1.21 J1.22 J1.23 J1.24 J1.25 J1.26 J1.27 J1.28 J1.29 J1.30 J1.31 J1.32 J1.33 J1.34 J1.35 J1.36 J1.37 J1.38 J1.39 J1.40 J1.41 J1.42 J1.43 J1.44 J1.45 J1.46 J1.47 J1.48 J1.49 J1.50 J1.51 J1.52 P1.4 PW2.4 PW2.9 PW2.10 PW2.11 PW2.12 U1.51 U1.55 U2.3 U2.5 YW.1
copper on no net: | length 45.1
  Top Layer w0.254: 140.594,39.171 140.594,36.207 142.474,36.207 142.474,39.176 144.43,39.176 144.43,36.207 146.411,36.207 146.411,39.151 148.468,39.151 148.468,36.207 150.686,36.207 150.686,40.627
  Top Layer w1.27: 240.072,67.345 240.072,83.187
  other v2: 149.083,52.682
  other v4: 172.676,37.788 172.676,44.588

## Other copper
Top Layer:
  pour cut-out: 149.368,44.895 148.308,45.955 150.075,47.723 151.136,46.662
  pour cut-out: 147.545,45.382 147.545,46.882 150.045,46.882 150.045,45.382
  pour cut-out: 142.295,42.632 142.295,44.132 144.795,44.132 144.795,42.632
  pour cut-out: 138.795,43.482 138.795,44.882 142.465,44.882 142.465,43.482

## Silkscreen, mask and mechanical layers (free items; w line width, h text height)
Mechanical 1:
  text "FLEXIBLE AREA" at 137.033,42.672 h0.8 r90
  text "FLEXIBLE AREA" at 122.936,42.164 h0.8 r90
Mechanical 13:
  lines w0.7: 105.41,56.896 154.94,56.896 ; 105.41,57.023 105.41,35.052 154.94,35.052 154.94,57.023

## Dimensions
105.537,58.674 to 155.194,58.547 on Mechanical 13
157.353,56.769 to 156.464,35.433 on Mechanical 13